# EAGLE board EEPROM_dev_REV-A (EAGLE 6.5.0)
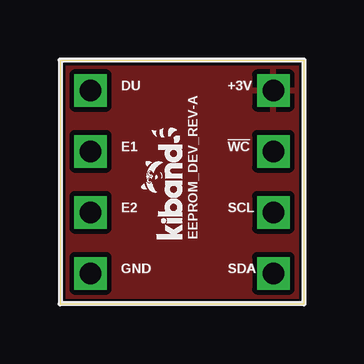
[diagram p0: board, top side]
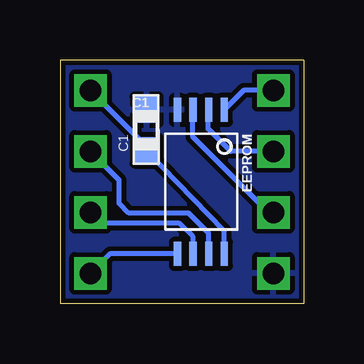
[diagram p1: board, bottom side, seen from below]

Size 10.16 x 10.16 mm. Coordinates in mm from the lower left corner, seen from the top.
Outline: 0,0 10.16,0 10.16,10.16 0,10.16 0,0
Copper layers (1*16): Top 0.035mm / dielectric 0.75mm / Bottom 0.035mm
Design rules "KiBand_8mil": minimum track width 8mil, minimum drill 8mil, track to track 8mil, track to pad 8mil, pad to pad 8mil, via to via 8mil, smd to smd 0mil, copper to edge 8mil, drill to drill 8mil, minimum pad ring 8mil, minimum via ring 8mil, stop-mask expansion 2.5mil, vias tented up to drill 6mil, thermal gap 8mil

## Footprints (pad centres in the part's own frame; a part is rotated, then mirrored left to right if it is on the bottom)
1X1_MALE_HEADER_0.1IN = drill 0.9 square: P$8 0,0
0603_PASSIVE = smd 1.1 x 1: 1 -0.85,0; 2 0.85,0
M24M01-RMN6TP = smd 1 x 0.3: !WC 5,1.8; DU -1,2.45; E1 -1,1.8; E2 -1,1.15; SCL 5,1.15; SDA 5,0.5; VCC 5,2.45; VSS -1,0.5

## Placement (x,y rotation side)
!WC  1X1_MALE_HEADER_0.1IN  [1X1_MALE_HEADER_0.1IN]  8.89,6.35 0 top
+3V  1X1_MALE_HEADER_0.1IN  [1X1_MALE_HEADER_0.1IN]  8.89,8.89 0 top
C1  0.1uF  [0603_PASSIVE]  6.55,7.24 90 bottom
DU  1X1_MALE_HEADER_0.1IN  [1X1_MALE_HEADER_0.1IN]  1.27,8.89 0 top
E1  1X1_MALE_HEADER_0.1IN  [1X1_MALE_HEADER_0.1IN]  1.27,6.35 0 top
E2  1X1_MALE_HEADER_0.1IN  [1X1_MALE_HEADER_0.1IN]  1.27,3.81 0 top
EEPROM  M24M01_M24M018-SOIC  [M24M01-RMN6TP]  5.77,7.09 270 bottom
GND  1X1_MALE_HEADER_0.1IN  [1X1_MALE_HEADER_0.1IN]  1.27,1.27 0 top
SCL  1X1_MALE_HEADER_0.1IN  [1X1_MALE_HEADER_0.1IN]  8.89,3.81 0 top
SDA  1X1_MALE_HEADER_0.1IN  [1X1_MALE_HEADER_0.1IN]  8.89,1.27 0 top

## Library data of the parts
!WC +3V C1 DU E1 E2 EEPROM GND SCL SDA = KIBAND_SCH_V3

## Nets
!WC: !WC.P$8 EEPROM.!WC
+3V: +3V.P$8 C1.1 EEPROM.VCC
DU: DU.P$8 EEPROM.DU
E1: E1.P$8 EEPROM.E1
E2: E2.P$8 EEPROM.E2
GND: C1.2 EEPROM.VSS GND.P$8
SCL: EEPROM.SCL SCL.P$8
SDA: EEPROM.SDA SDA.P$8

## Tracks (layer width: path | path; a pad name or v marks a point on that pad's centre or on a via)
!WC
  Bottom 0.203: EEPROM.!WC 3.97,2.95 4.8,3.79 7.29,3.79 7.7,4.19 7.7,5.16 !WC.P$8
+3V
  Bottom 0.203: EEPROM.VCC 3.32,3.05 C1.1 6.55,6.55 +3V.P$8
  pour Top: 0,0 10.16,0 10.16,10.16 0,10.16
DU
  Bottom 0.203: DU.P$8 2.51,8.89 EEPROM.DU
E1
  Bottom 0.203: E1.P$8 3.05,6.35 3.99,7.29 3.99,8.06 EEPROM.E1
E2
  Bottom 0.203: E2.P$8 1.47,3.81 4.62,6.96 EEPROM.E2
GND
  pour Bottom: 0,10.16 10.16,10.16 10.16,0 0,0
SCL
  Bottom 0.203: EEPROM.SCL 4.62,2.79 5.18,3.35 8.43,3.35 SCL.P$8
SDA
  Bottom 0.203: EEPROM.SDA 8.07,2.09 SDA.P$8

## Text on the board
_tsilk: F:/Google Drive/CTO/KiBand/Boards/Graphics/logo.bmp | EEPROM_DEV_REV-A